# Altium PCB G1 Bus Breakout.PcbDoc
Units mm, origin at the board's own origin, x right, y up, seen from the top; angles counter-clockwise.
Board outline 87.47 x 63.78 mm, 2 copper layers (Top Layer, Bottom Layer), stack 1.569 mm thick; 4 components, 38 nets, 180 pads, 214 vias.
Unrouted connection lines stored in the file: 2.
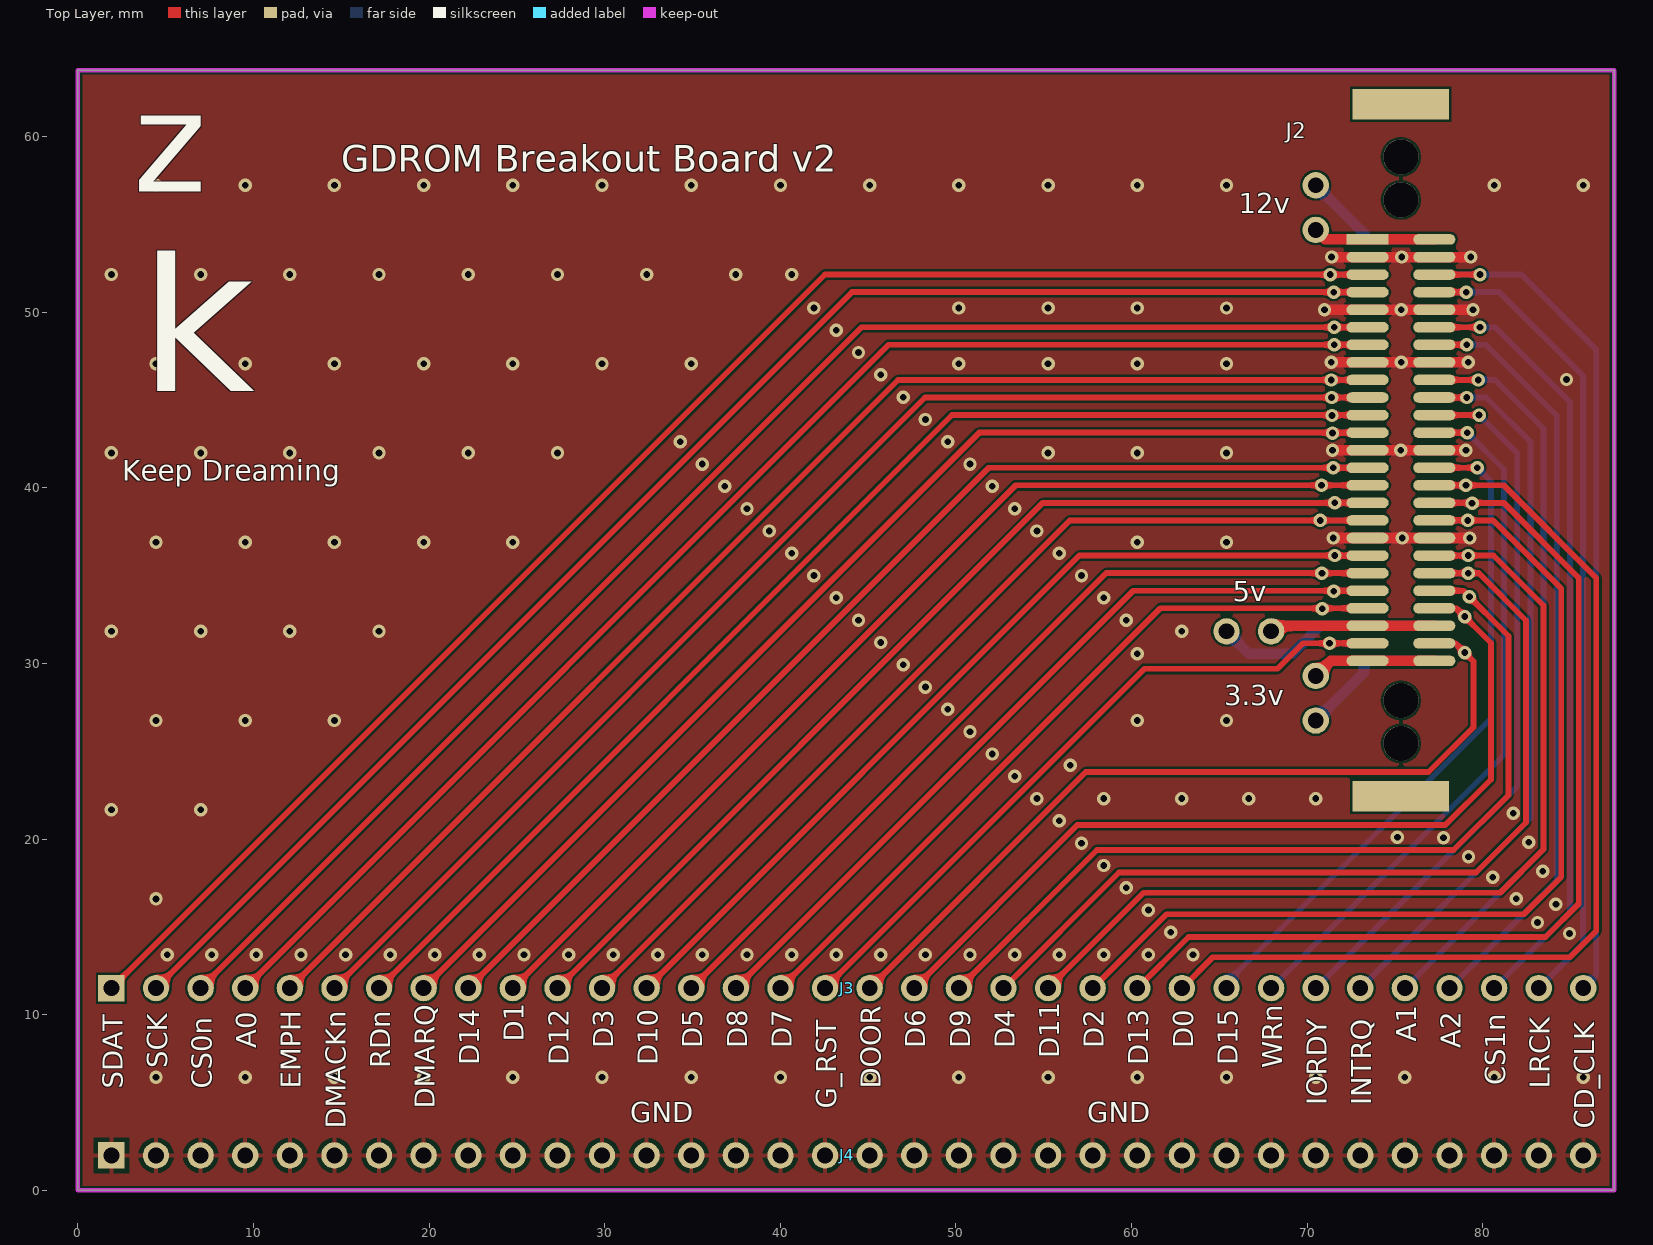
[diagram p0: Top Layer view]
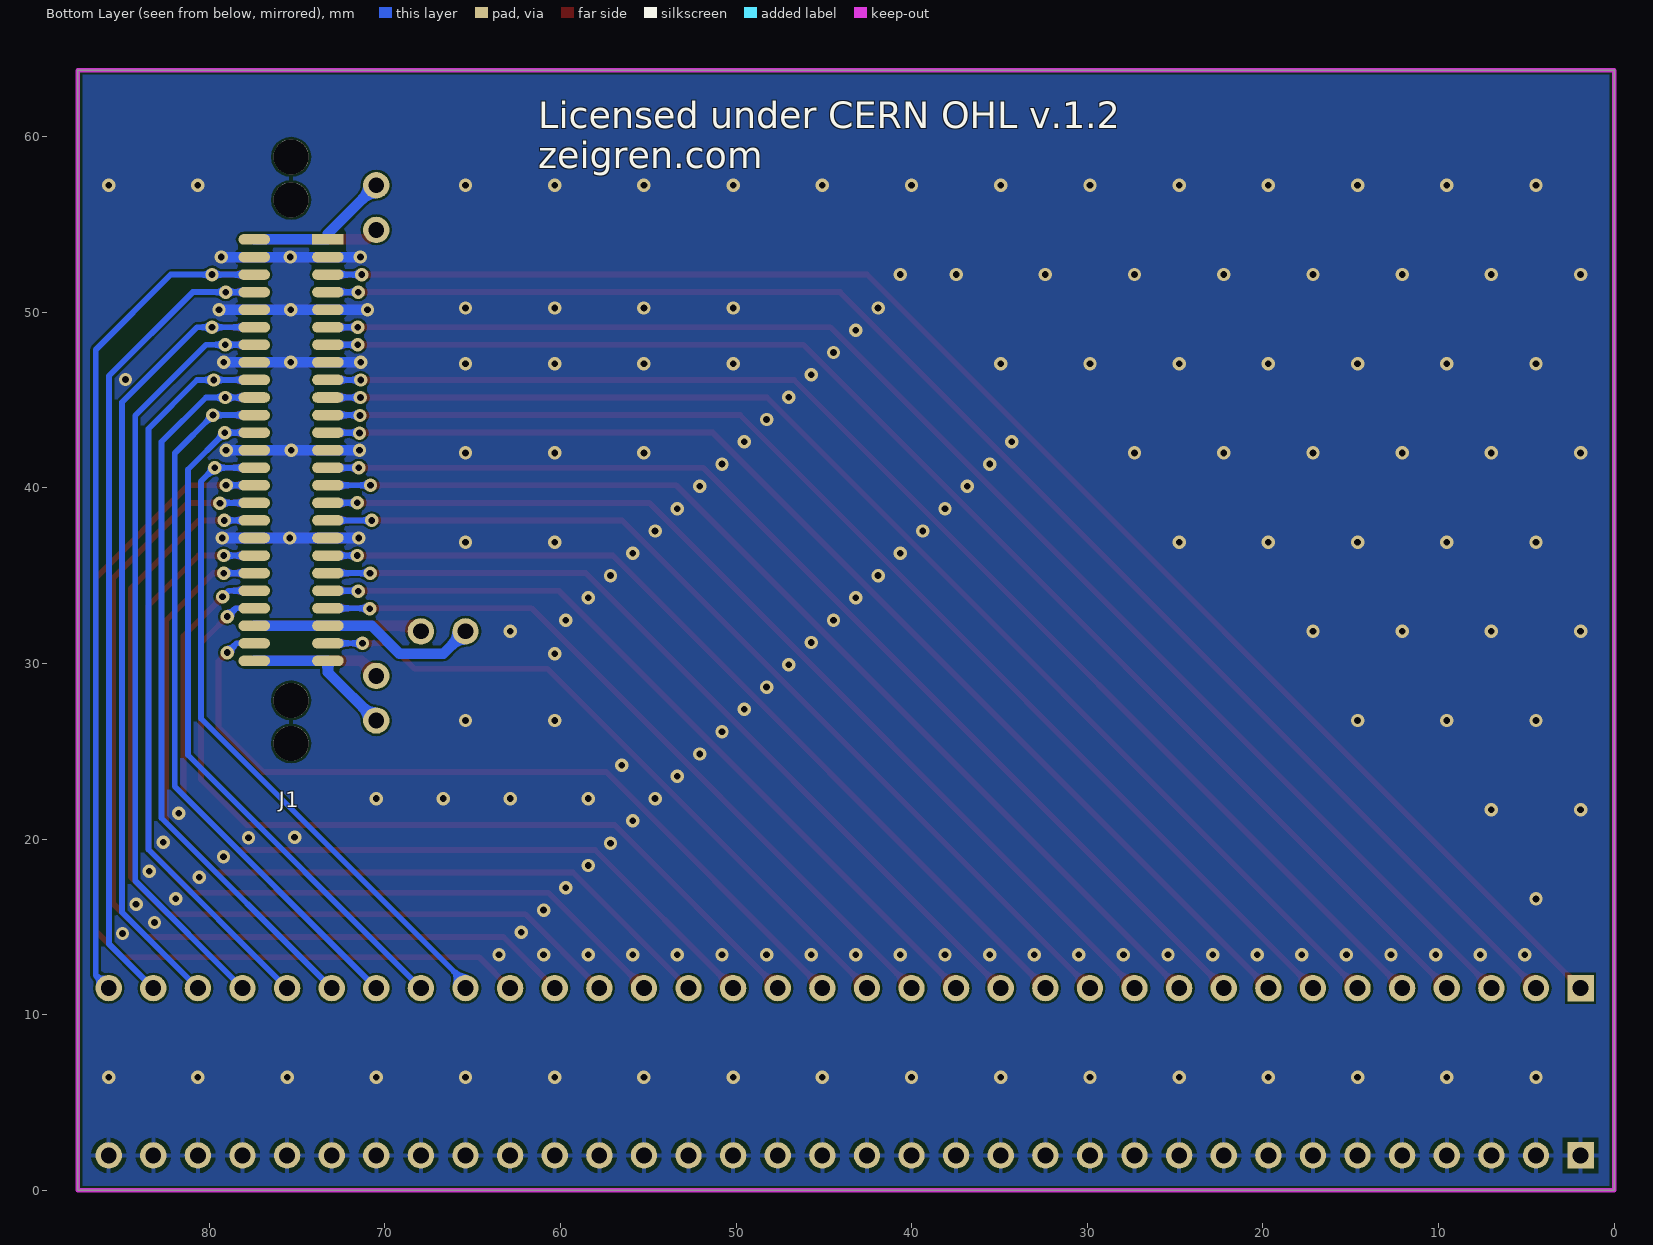
[diagram p1: Bottom Layer view, seen from below]

## Layer stack, top to bottom
Top Solder: solder mask 0.0254, SM-001, Dk 4
Top Layer: signal copper 0.035
Dielectric 1: core 1.4986, Core-043, Dk 4.3
Bottom Layer: signal copper 0.035
Bottom Solder: solder mask 0.0254, SM-001, Dk 4

## Board outline
0,0 0,63.775 87.475,63.775 87.475,0

## Design rules (kind name [scope] priority, off if disabled: settings)
BoardOutlineClearance [All] p1: gap=0.2 ignorepadtopadclearanceinfootprint=FALSE
Clearance [All] p1: gap=0.127 ignorepadtopadclearanceinfootprint=FALSE except(0: Arc-Hole Track-Hole SMDPad-Hole THPad-Hole Via-Hole Fill-Hole Poly-Hole Region-Hole Text-Hole)
ComponentClearance [All] p1: gap=0.254 collisioncheckmode=3 verticalgap=2540 showdistances=FALSE
HoleSize [All] p1: absolutevalues=TRUE maxlimit=6.3 minlimit=0.3 maxpercent=80.000 minpercent=20.000
MinimumAnnularRing [All] p1: minimumring=0.076
MinimumSolderMaskSliver [All] p1: minsoldermaskwidth=0.102
PasteMaskExpansion [All] p1: expansion=0.051
PlaneConnect [All] p1: pad.planeconnectstyle=Relief pad.reliefexpansion=0.508 pad.reliefentries=4 pad.reliefconductorwidth=0.254 pad.reliefairgap=0.254 via.planeconnectstyle=Direct via.reliefexpansion=0.508 via.reliefentries=4 via.reliefconductorwidth=0.254 via.reliefairgap=0.254
PolygonConnect [All] p1: thpad.connectstyle=Relief thpad.reliefconductorwidth=0.254 thpad.reliefentries=4 thpad.polygonreliefangle="90 Angle" thpad.airgapwidth=0.254 smdpad.connectstyle=Relief smdpad.reliefconductorwidth=0.254 smdpad.reliefentries=4 smdpad.polygonreliefangle="90 Angle" smdpad.airgapwidth=0.254 via.connectstyle=Direct via.reliefconductorwidth=0.254 via.reliefentries=4 via.polygonreliefangle="90 Angle" via.airgapwidth=0.254
RoutingVias [All] p1: holewidth=0.3 width=0.6 viastyle="Through Hole" minholewidth=0.3 minwidth=0.6 maxholewidth=6.3 maxwidth=6.5
SMDEntry [All] p1: side=TRUE corner=TRUE anyangle=FALSE
SilkToBoardRegionClearance assss [All] p1:
SilkToSilkClearance [All] p1: silktosilkclearance=0.152
SilkToSolderMaskClearance [IsPad] p1: minsilkscreentomaskgap=0.152 clearancetoexposedcopper=TRUE
SolderMaskExpansion [All] p1: expansion=0.025
UnRoutedNet [All] p1: checkbadconnections=TRUE
Width [All] p1: maxlimit=2.54 minlimit=0.127 preferedwidth=0.152
21 further rules are at their usual default settings.

## Components (designator, comment, footprint, x,y, rotation, side; value= is the part's Value field where it differs from the comment)
J1 "GDROM CONNECTOR" GDROMCONN 75.34,27.9 r0 top locked
J2 "GDROM Female Connector" "GDROM Female CONN" 73.44,54.15 r0 top locked
J3 "2.54mm 37-Pin Header" "37 Pins" 1.905,11.515 r90 top
J4 "2.54mm 37-Pin Header" "37 Pins" 1.905,1.99 r90 top

## Footprints (in the part's own frame and the unit in brackets; to place one, negate y for a bottom-side part, rotate by r counter-clockwise, add the part's x,y. Pads: shape width x height; smd on the part's side, far side on the other; paste and mask are expansions set on the pad)
"37 Pins" [mm]
  rect 1.5x1.5 hole 0.9: 1(0,0)
  round 1.5 hole 0.9: 2(0,-2.54) 3(0,-5.08) 4(0,-7.62) 5(0,-10.16) 6(0,-12.7) 7(0,-15.24) 8(0,-17.78) 9(0,-20.32) 10(0,-22.86) 11(0,-25.4) 12(0,-27.94) 13(0,-30.48) 14(0,-33.02) 15(0,-35.56) 16(0,-38.1) 17(0,-40.64) 18(0,-43.18) 19(0,-45.72) 20(0,-48.26) 21(0,-50.8) 22(0,-53.34) 23(0,-55.88) 24(0,-58.42) 25(0,-60.96) 26(0,-63.5) 27(0,-66.04) 28(0,-68.58) 29(0,-71.12) 30(0,-73.66) 31(0,-76.2) 32(0,-78.74) 33(0,-81.28) 34(0,-83.82)
"GDROM Female CONN" [mm]
  rect 2.4x0.6 smd: 1(0,0)
  oval 2.4x0.6 smd: 2(0,-1) 3(0,-2) 4(0,-3) 5(0,-4) 6(0,-5) 7(0,-6) 8(0,-7) 9(0,-8) 10(0,-9) 11(0,-10) 12(0,-11) 13(0,-12) 14(0,-13) 15(0,-14) 16(0,-15) 17(0,-16) 18(0,-17) 19(0,-18) 20(0,-19) 21(0,-20) 22(0,-21) 23(0,-22) 24(0,-23) 25(0,-24) 26(3.8,-24) 27(3.8,-23) 28(3.8,-22) 29(3.8,-21) 30(3.8,-20) 31(3.8,-19) 32(3.8,-18) 33(3.8,-17) 34(3.8,-16) 35(3.8,-15) 36(3.8,-14) 37(3.8,-13) 38(3.8,-12) 39(3.8,-11) 40(3.8,-10) 41(3.8,-9) 42(3.8,-8) 43(3.8,-7) 44(3.8,-6) 45(3.8,-5) 46(3.8,-4) 47(3.8,-3) 48(3.8,-2) 49(3.8,-1) 50(3.8,0)
  rect 5.5x1.75 smd: ""(1.9,-31.7) ""(1.9,7.7)
  round 2 hole 2: ""(1.9,-28.7) ""(1.9,4.7)
  body extent -1.39,-31.66 5.21,7.54, height 16.17
GDROMCONN [mm]
  rect 1.8x0.6 smd far side: 1(-2.1,26.25)
  oval 1.8x0.6 smd far side: 2(-2.1,25.25) 3(-2.1,24.25) 4(-2.1,23.25) 5(-2.1,22.25) 6(-2.1,21.25) 7(-2.1,20.25) 8(-2.1,19.25) 9(-2.1,18.25) 10(-2.1,17.25) 11(-2.1,16.25) 12(-2.1,15.25) 13(-2.1,14.25) 14(-2.1,13.25) 15(-2.1,12.25) 16(-2.1,11.25) 17(-2.1,10.25) 18(-2.1,9.25) 19(-2.1,8.25) 20(-2.1,7.25) 21(-2.1,6.25) 22(-2.1,5.25) 23(-2.1,4.25) 24(-2.1,3.25) 25(-2.1,2.25) 26(2.1,2.25) 27(2.1,3.25) 28(2.1,4.25) 29(2.1,5.25) 30(2.1,6.25) 31(2.1,7.25) 32(2.1,8.25) 33(2.1,9.25) 34(2.1,10.25) 35(2.1,11.25) 36(2.1,12.25) 37(2.1,13.25) 38(2.1,14.25) 39(2.1,15.25) 40(2.1,16.25) 41(2.1,17.25) 42(2.1,18.25) 43(2.1,19.25) 44(2.1,20.25) 45(2.1,21.25) 46(2.1,22.25) 47(2.1,23.25) 48(2.1,24.25) 49(2.1,25.25) 50(2.1,26.25)
  round 2 hole 2 unplated: ""(0,0) ""(0,28.5)
  body extent -3,-1.23 3,29.67, height 0.15

## Part data
J1: library part "GDROM CONN 52602-0579"

## Free pads (board coordinates)
  round 1.5 hole 0.9: ""(65.405,31.835) ""(67.945,31.835) ""(70.485,26.755) ""(70.485,29.295) ""(70.485,54.695) ""(70.485,57.235)

## Via types
v1: diameter 0.762, hole 0.381, Top Layer to Bottom Layer, tented both sides, 214 vias

## Nets (pads, with @x,y where several pads share a name; then routed paths per layer and width w, separated by ;. In a path a pad name is that pad's centre, name@x,y a point inside that pad or via, vN(x,y) a via of type N, cw(c..) or ccw(c..) an arc to the next point about the centre after c; other vN are vias at no path point)
3.3V: J1.25 J1.26 J2.25 J2.26 pad.@70.485,26.755 pad.@70.485,29.295 | length 15.8
  Top Layer w0.6: pad.@70.485,29.295 71.34,30.15 J2.25 J2.26
  Bottom Layer w0.6: pad.@70.485,26.755 73.24,29.51 J1.25 J1.26
5V: J1.23 J1.28 J2.23 J2.28 pad.@65.405,31.835 pad.@67.945,31.835 | length 22.6
  Top Layer w0.6: pad.@67.945,31.835 68.26,32.15 J2.23 J2.28
  Bottom Layer w0.6: pad.@65.405,31.835 66.675,30.565 69.164,30.565 70.749,32.15 J1.23 J1.28
12V: J1.1 J1.50 J2.1 J2.50 pad.@70.485,54.695 pad.@70.485,57.235 | length 15.4
  Top Layer w0.6: pad.@70.485,54.695 71.03,54.15 J2.1 J2.50
  Bottom Layer w0.6: pad.@70.485,57.235 73.24,54.48 J1.1 J1.50
A0: J1.7 J2.7 J3.4 | length 80.8
  Top Layer w0.33: J3.4 46.16,48.15 v1(71.54,48.15) J2.7
  Bottom Layer w0.33: v1(71.54,48.15) J1.7
A1: J1.42 J2.42 J3.30 | length 44.8
  Top Layer w0.33: J2.42 v1(79.74,46.15)
  Bottom Layer w0.33: J3.30 83.465,19.415 83.465,43.375 80.69,46.15 v1(79.74,46.15) J1.42
A2: J1.44 J2.44 J3.31 | length 45.4
  Top Layer w0.33: J2.44 v1(79.09,48.15)
  Bottom Layer w0.33: J1.44 v1(79.09,48.15) 80.19,48.15 84.215,44.125 84.215,17.625 J3.31
CD_CLK: J1.48 J2.48 J3.34 | length 50.1
  Top Layer w0.33: J2.48 v1(79.84,52.15)
  Bottom Layer w0.33: J1.48 v1(79.84,52.15) 82.19,52.15 86.465,47.875 86.465,12.255 J3.34
CS0n: J1.6 J2.6 J3.3 | length 83.7
  Top Layer w0.33: J3.3 44.62,49.15 v1(71.54,49.15) J2.6
  Bottom Layer w0.33: v1(71.54,49.15) J1.6
CS1n: J1.45 J2.45 J3.32 | length 47
  Top Layer w0.33: J2.45 v1(79.84,49.15)
  Bottom Layer w0.33: J1.45 v1(79.84,49.15) 80.69,49.15 84.965,44.875 84.965,15.835 J3.32
D0: J1.36 J2.36 J3.25 | length 58.1
  Top Layer w0.33: J3.25 64.625,13.275 84.965,13.275 86.465,14.775 86.465,34.875 81.19,40.15 J2.36
  Bottom Layer w0.33: J1.36 v1(79.04,40.15)
D1: J1.15 J2.15 J3.10 | length 63
  Top Layer w0.33: J3.10 53.4,40.15 J2.15
  Bottom Layer w0.33: v1(70.815,40.15) J1.15
D2: J1.34 J2.34 J3.23 | length 56.3
  Top Layer w0.33: J3.23 61.995,15.725 82.34,15.725 84.465,17.85 84.465,34.275 80.59,38.15 J2.34
  Bottom Layer w0.33: J1.34 v1(79.14,38.15)
D3: J1.17 J2.17 J3.12 | length 57.1
  Top Layer w0.33: J3.12 56.48,38.15 J2.17
  Bottom Layer w0.33: v1(70.74,38.15) J1.17
D4: J1.31 J2.31 J3.21 | length 53.2
  Top Layer w0.33: J3.21 59.29,18.1 79.615,18.1 82.465,20.95 82.465,32.45 79.765,35.15 J2.31
  Bottom Layer w0.33: J1.31 v1(79.165,35.15)
D5: J1.20 J2.20 J3.14 | length 50.7
  Top Layer w0.33: J3.14 58.56,35.15 J2.20
  Bottom Layer w0.33: v1(70.84,35.15) J1.20
D6: J1.29 J2.29 J3.19 | length 51.3
  Top Layer w0.33: J3.19 56.91,20.8 77.865,20.8 80.465,23.4 80.465,31.175 78.49,33.15 J2.29
  Bottom Layer w0.33: J1.29 78.49,33.15 v1(78.965,32.675)
D7: J1.22 J2.22 J3.16 | length 44.8
  Top Layer w0.33: J3.16 61.64,33.15 J2.22
  Bottom Layer w0.33: v1(70.865,33.125) 70.89,33.15 J1.22
D8: J1.21 J2.21 J3.15 | length 47.1
  Top Layer w0.33: J3.15 60.1,34.15 J2.21
  Bottom Layer w0.33: v1(71.515,34.125) 71.54,34.15 J1.21
D9: J1.30 J2.30 J3.20 | length 52.2
  Top Layer w0.33: J3.20 58.025,19.375 78.34,19.375 81.465,22.5 81.465,31.575 78.89,34.15 J2.30
  Bottom Layer w0.33: J1.30 78.89,34.15 v1(79.24,33.8)
D10: J1.19 J2.19 J3.13 | length 52.9
  Top Layer w0.33: J3.13 57.02,36.15 J2.19
  Bottom Layer w0.33: v1(71.565,36.15) J1.19
D11: J1.32 J2.32 J3.22 | length 54.5
  Top Layer w0.33: J3.22 60.68,16.95 80.99,16.95 83.465,19.425 83.465,33.3 80.615,36.15 J2.32
  Bottom Layer w0.33: J1.32 v1(79.165,36.15)
D12: J1.16 J2.16 J3.11 | length 59.3
  Top Layer w0.33: J3.11 54.94,39.15 J2.16
  Bottom Layer w0.33: v1(71.565,39.15) J1.16
D13: J1.35 J2.35 J3.24 | length 57.6
  Top Layer w0.33: J3.24 63.235,14.425 83.565,14.425 85.465,16.325 85.465,34.875 81.19,39.15 J2.35
  Bottom Layer w0.33: J1.35 79.365,39.15 v1(79.39,39.125)
D14: J1.14 J2.14 J3.9 | length 65.2
  Top Layer w0.33: J3.9 51.86,41.15 J2.14
  Bottom Layer w0.33: v1(71.49,41.15) J1.14
D15: J1.37 J2.37 J3.26 | length 40.9
  Top Layer w0.33: J2.37 v1(79.69,41.15)
  Bottom Layer w0.33: J3.26 65.405,11.815 80.465,26.875 80.465,40.375 v1(79.69,41.15) J1.37
DMACKn: J1.10 J2.10 J3.6 | length 74.6
  Top Layer w0.33: J3.6 48.24,45.15 J2.10
  Bottom Layer w0.33: v1(71.39,45.15) J1.10
DMARQ: J1.12 J2.12 J3.8 | length 68.7
  Top Layer w0.33: J3.8 51.32,43.15 J2.12
  Bottom Layer w0.33: v1(71.44,43.125) 71.465,43.15 J1.12
DOOR: J1.27 J2.27 J3.18 | length 48.7
  Top Layer w0.33: J3.18 57.395,23.825 76.915,23.825 79.465,26.375 79.465,30.125 v1(78.965,30.625) 78.44,31.15 J2.27
  Bottom Layer w0.33: J1.27 78.44,31.15 v1(78.965,30.625)
EMPH: J1.9 J2.9 J3.5 | length 77.6
  Top Layer w0.33: J3.5 46.7,46.15 J2.9
  Bottom Layer w0.33: v1(71.365,46.15) J1.9
G_RST: J1.24 J2.24 J3.17 | length 41
  Top Layer w0.33: J3.17 60.73,29.7 68.315,29.7 69.765,31.15 v1(71.273,31.15) J2.24
  Bottom Layer w0.33: v1(71.273,31.15) J1.24
GND: J1.2 J1.5 J1.8 J1.13 J1.18 J1.33 J1.38 J1.43 J1.46 J1.49 J2.2 J2.5 J2.8 J2.13 J2.18 J2.33 J2.38 J2.43 J2.46 J2.49 J4.1 J4.2 J4.3 J4.4 J4.5 J4.6 J4.7 J4.8 J4.9 J4.10 J4.11 J4.12 J4.13 J4.14 J4.15 J4.16 J4.17 J4.18 J4.19 J4.20 J4.21 J4.22 J4.23 J4.24 J4.25 J4.26 J4.27 J4.28 J4.29 J4.30 J4.31 J4.32 J4.33 J4.34 | length 79.1
  Top Layer w0.6: v1(70.99,50.15) J2.5 J2.46 v1(79.44,50.15) ; v1(71.365,47.15) J2.8 J2.43 v1(79.165,47.15) ; v1(71.39,53.15) J2.2 J2.49 v1(79.315,53.15) ; v1(71.44,42.15) J2.13 J2.38 v1(79.04,42.15) ; v1(71.49,37.15) J2.18 J2.33 v1(79.265,37.15)
  Bottom Layer w0.6: v1(70.99,50.15) v1(79.44,50.15) ; v1(71.365,47.15) v1(79.165,47.15) ; v1(71.39,53.15) v1(79.315,53.15) ; v1(71.44,42.15) v1(79.04,42.15) ; v1(71.49,37.15) v1(79.265,37.15)
  other v1: 4.445,6.435 9.525,6.435 14.605,6.435 19.685,6.435 24.765,6.435 29.845,6.435 34.925,6.435 40.005,6.435 45.085,6.435 50.165,6.435 55.245,6.435 60.325,6.435 65.405,6.435 70.485,6.435 75.565,6.435 80.645,6.435 85.725,6.435 5.08,13.42 7.62,13.42 10.16,13.42 12.7,13.42 15.24,13.42 17.78,13.42 20.32,13.42 22.86,13.42 25.4,13.42 27.94,13.42 30.48,13.42 33.02,13.42 35.56,13.42 38.1,13.42 40.64,13.42 43.18,13.42 45.72,13.42 48.26,13.42 50.8,13.42 53.34,13.42 55.88,13.42 58.42,13.42 60.96,13.42 63.5,13.42 84.94,14.625 62.23,14.69 83.115,15.25 60.96,15.96 84.165,16.3 4.445,16.595 81.915,16.6 59.69,17.23 80.565,17.825 83.415,18.175 58.42,18.5 79.19,19 57.15,19.77 82.615,19.825 77.765,20.075 75.14,20.1 55.88,21.04 81.74,21.475 1.905,21.675 6.985,21.675 54.61,22.31 58.42,22.31 62.865,22.31 66.675,22.31 70.485,22.31 53.34,23.58 56.515,24.215 52.07,24.85 50.8,26.12 4.445,26.755 9.525,26.755 14.605,26.755 60.325,26.755 65.405,26.755 49.53,27.39 48.26,28.66 46.99,29.93 60.325,30.565 45.72,31.2 1.905,31.835 6.985,31.835 12.065,31.835 17.145,31.835 62.865,31.835 44.45,32.47 59.69,32.47 43.18,33.74 58.42,33.74 41.91,35.01 57.15,35.01 40.64,36.28 55.88,36.28 4.445,36.915 9.525,36.915 14.605,36.915 19.685,36.915 24.765,36.915 60.325,36.915 65.405,36.915 75.413,37.15 39.37,37.55 54.61,37.55 38.1,38.82 53.34,38.82 36.83,40.09 52.07,40.09 35.56,41.36 50.8,41.36 1.905,41.995 6.985,41.995 12.065,41.995 17.145,41.995 22.225,41.995 27.305,41.995 55.245,41.995 60.325,41.995 65.405,41.995 75.336,42.147 34.29,42.63 49.53,42.63 48.26,43.9 46.99,45.17 84.765,46.175 45.72,46.44 4.445,47.075 9.525,47.075 14.605,47.075 19.685,47.075 24.765,47.075 29.845,47.075 34.925,47.075 50.165,47.075 55.245,47.075 60.325,47.075 65.405,47.075 75.362,47.15 44.45,47.71 43.18,48.98 75.362,50.15 41.91,50.25 50.165,50.25 55.245,50.25 60.325,50.25 65.405,50.25 1.905,52.155 6.985,52.155 12.065,52.155 17.145,52.155 22.225,52.155 27.305,52.155 32.385,52.155 37.465,52.155 40.64,52.155 75.387,53.15 4.445,57.235 9.525,57.235 14.605,57.235 19.685,57.235 24.765,57.235 29.845,57.235 34.925,57.235 40.005,57.235 45.085,57.235 50.165,57.235 55.245,57.235 60.325,57.235 65.405,57.235 80.645,57.235 85.725,57.235
INTRQ: J1.41 J2.41 J3.29 | length 43.3
  Top Layer w0.33: J2.41 v1(79.09,45.15)
  Bottom Layer w0.33: J3.29 82.715,21.205 82.715,42.625 80.19,45.15 v1(79.09,45.15) J1.41
IORDY: J1.40 J2.40 J3.28 | length 43.2
  Top Layer w0.33: J2.40 v1(79.79,44.15)
  Bottom Layer w0.33: J3.28 81.965,22.995 81.965,41.975 v1(79.79,44.15) J1.40
LRCK: J1.47 J2.47 J3.33 | length 48
  Top Layer w0.33: J2.47 v1(79.065,51.15)
  Bottom Layer w0.33: J1.47 v1(79.065,51.15) 80.94,51.15 85.715,46.375 85.715,14.045 J3.33
RDn: J1.11 J2.11 J3.7 | length 71.6
  Top Layer w0.33: J3.7 49.78,44.15 J2.11
  Bottom Layer w0.33: v1(71.415,44.125) 71.44,44.15 J1.11
SCK: J1.4 J2.4 J3.2 | length 87.1
  Top Layer w0.33: J3.2 44.08,51.15 v1(71.515,51.15) J2.4
  Bottom Layer w0.33: v1(71.515,51.15) J1.4
SDAT: J1.3 J2.3 J3.1 | length 90.3
  Top Layer w0.33: J3.1 42.54,52.15 J2.3
  Bottom Layer w0.33: v1(71.315,52.15) J1.3
WRn: J1.39 J2.39 J3.27 | length 41.6
  Top Layer w0.33: J2.39 v1(79.115,43.15)
  Bottom Layer w0.33: J3.27 81.215,24.785 81.215,41.05 v1(79.115,43.15) J1.39
pads on no net: J1. J2.

## Polygon pours and split planes (outlines as drawn)
GND on Bottom Layer "GND" (solid, remove dead copper, pour order 0): -1.16,64.983 -1.16,-1.25 89.04,-1.25 89.04,65.406
GND on Top Layer "TOP GND" (solid, remove dead copper, pour order 2): -1.285,65.375 -1.535,65.125 -1.535,-1.125 88.465,-1.125 88.465,64.875

## Keep-outs
Keep-Out Layer:
  the board outline again, w0.254

## Silkscreen, mask and mechanical layers (free items; w line width, h text height)
Top Overlay:
  text "GDROM Breakout Board v2" at 15,58 h1.52
  text "12v" at 66.091,55.635 h1.14
  text "z" at 3.153,55 h10
  text "k" at 3.5,42.5 h16
  text "Keep Dreaming" at 2.519,40 h2
  text "5v" at 65.761,33.537 h1.14
  text "3.3v" at 65.278,27.619 h1.14
  text "D1" at 25.4,8.466 h1.14 r90
  text "A1" at 76.2,8.466 h1.14 r90
  text "A0" at 10.16,8.085 h1.14 r90
  text "D3" at 30.48,8.085 h1.14 r90
  text "D5" at 35.56,8.085 h1.14 r90
  text "D8" at 38.1,8.085 h1.14 r90
  text "D7" at 40.64,8.085 h1.14 r90
  text "D6" at 48.26,8.085 h1.14 r90
  text "D9" at 50.8,8.085 h1.14 r90
  text "D4" at 53.34,8.085 h1.14 r90
  text "D2" at 58.42,8.085 h1.14 r90
  text "D0" at 63.5,8.085 h1.14 r90
  text "A2" at 78.74,8.085 h1.14 r90
  text "D11" at 55.88,7.514 h1.14 r90
  text "D14" at 22.86,7.133 h1.14 r90
  text "D12" at 27.94,7.133 h1.14 r90
  text "D10" at 33.02,7.133 h1.14 r90
  text "D13" at 60.96,7.133 h1.14 r90
  text "D15" at 66.04,7.133 h1.14 r90
  text "SCK" at 5.08,6.943 h1.14 r90
  text "RDn" at 17.78,6.943 h1.14 r90
  text "WRn" at 68.58,6.943 h1.14 r90
  text "CS1n" at 81.28,5.99 h1.14 r90
  text "SDAT" at 2.54,5.8 h1.14 r90
  text "CS0n" at 7.62,5.8 h1.14 r90
  text "EMPH" at 12.7,5.8 h1.14 r90
  text "DOOR" at 45.72,5.8 h1.14 r90
  text "LRCK" at 83.82,5.8 h1.14 r90
  text "IORDY" at 71.12,4.848 h1.14 r90
  text "INTRQ" at 73.66,4.848 h1.14 r90
  text "DMARQ" at 20.32,4.657 h1.14 r90
  text "G_RST" at 43.18,4.657 h1.14 r90
  text "GND" at 31.465,3.875 h1.14
  text "GND" at 57.465,3.875 h1.14
  text "DMACKn" at 15.24,3.515 h1.14 r90
  text "CD_CLK" at 86.36,3.515 h1.14 r90
Bottom Overlay:
  text "Licensed under CERN OHL v.1.2 / zeigren.com" at 61.25,58.2 h1.52